# EAGLE board OBD-II-UART_Panel_v13 (EAGLE 7.4.0), part 1 of 5
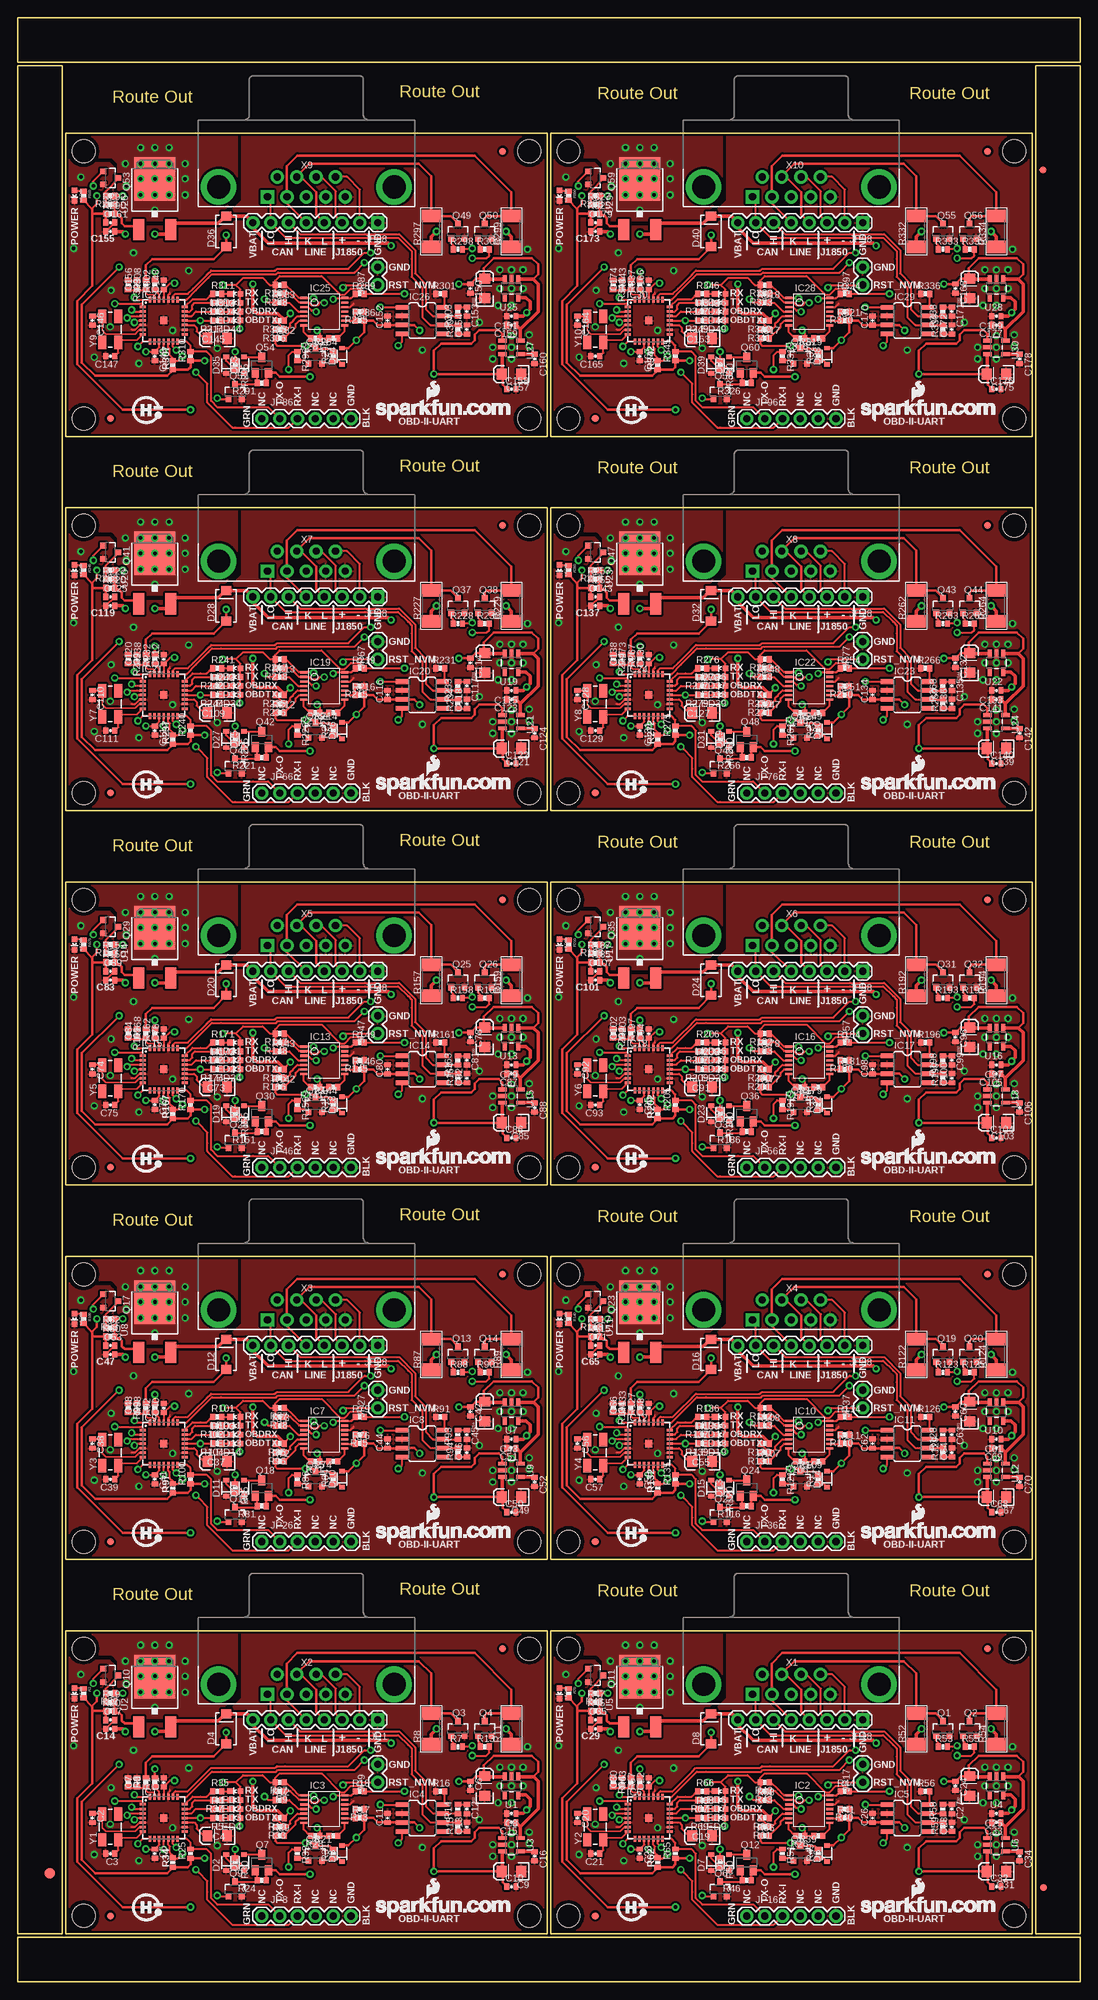
[diagram p0: board, top side]
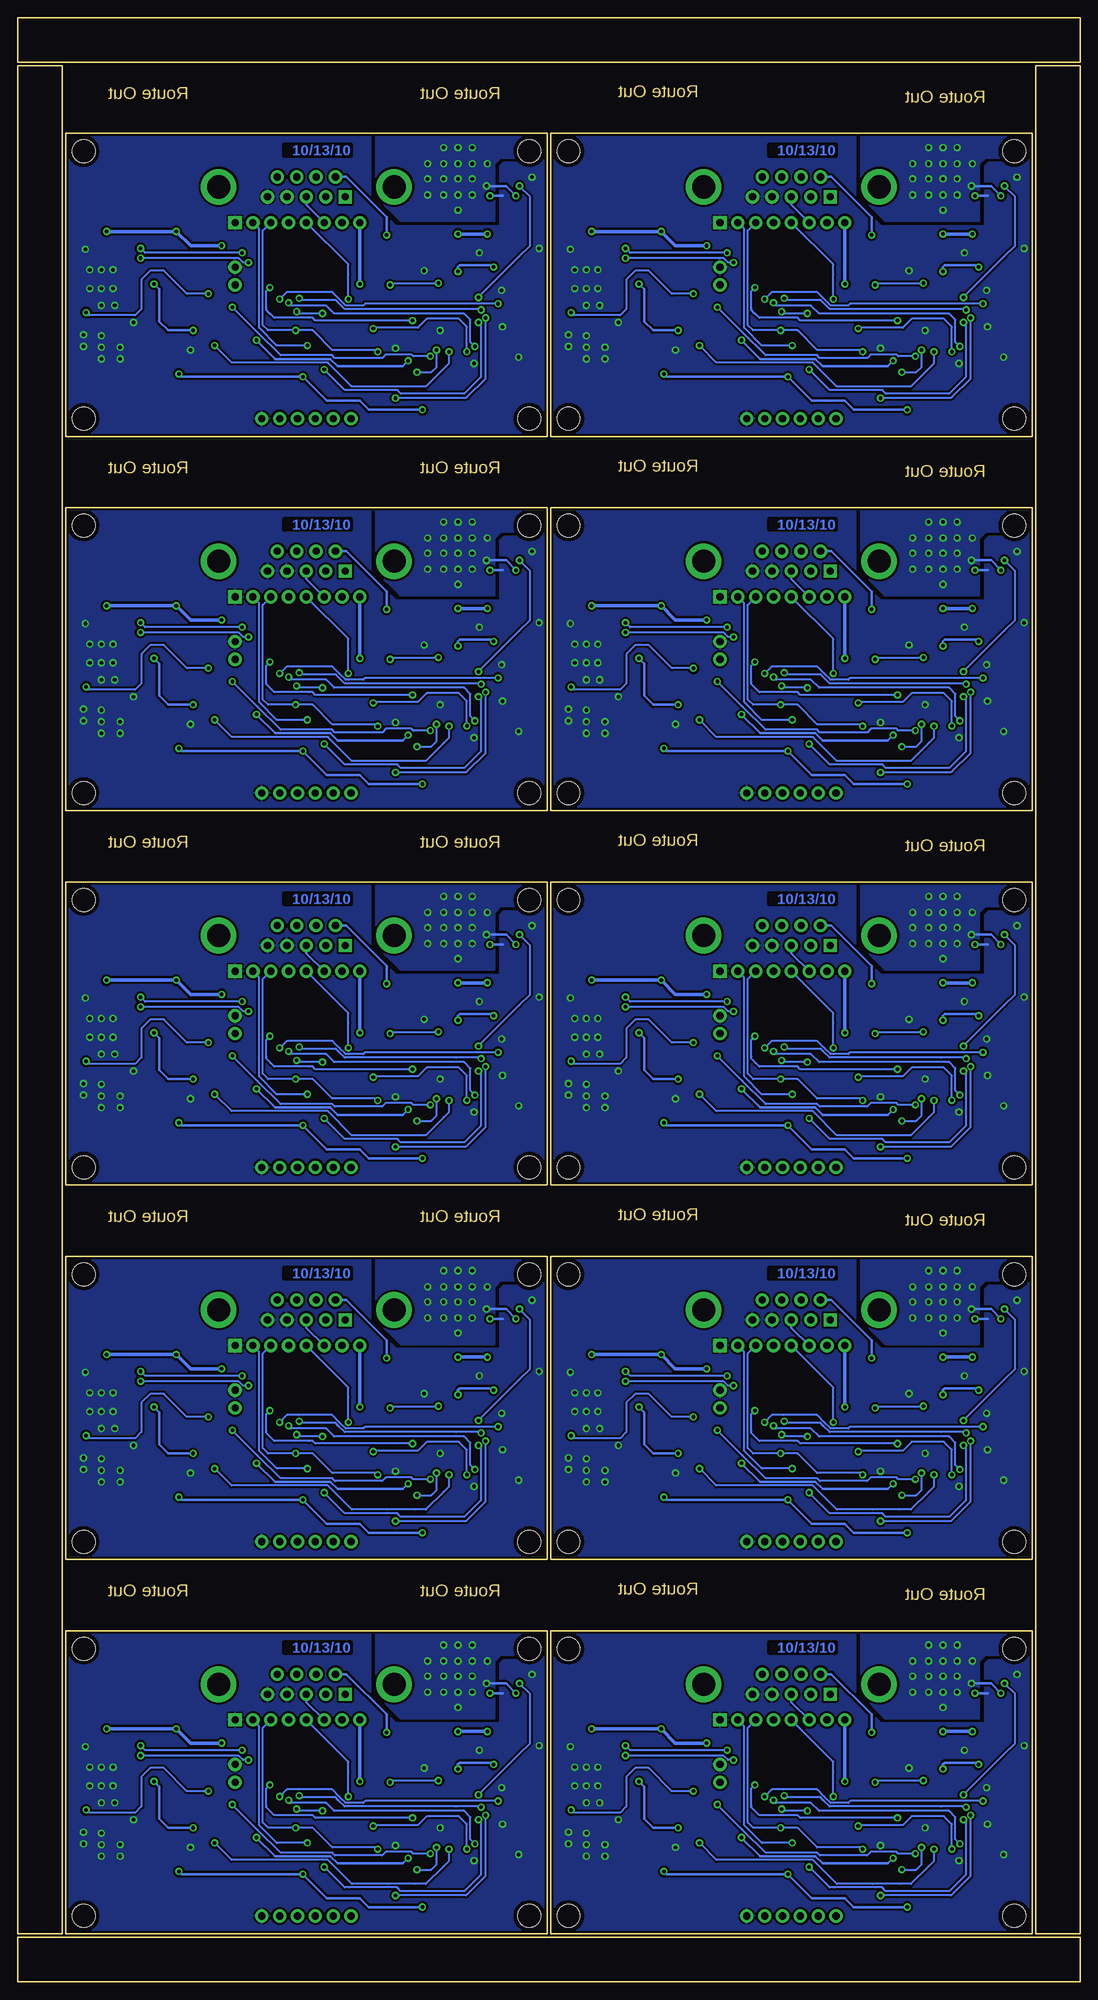
[diagram p1: board, bottom side, seen from below]

Size 151.38 x 279.91 mm. Coordinates in mm from the lower left corner, seen from the top.
Outline: 6.35,79.25 6.35,6.86 0,6.86 0,29.72
Outline: 0,27.18 0,273.05 6.35,273.05 6.35,76.71
Outline: 79.25,0 0,0 0,6.35 29.72,6.35
Outline: 27.18,6.35 151.38,6.35 151.38,0 76.71,0
Outline: 151.38,79.25 151.38,6.86 145.03,6.86 145.03,29.72
Outline: 145.03,27.18 145.03,273.05 151.38,273.05 151.38,76.71
Outline: 79.25,273.56 0,273.56 0,279.91 29.72,279.91
Outline: 27.18,279.91 151.38,279.91 151.38,273.56 76.71,273.56
Outline: 6.86,6.86 75.44,6.86 75.44,50.04 6.86,50.04 6.86,6.86
Outline: 75.95,6.86 144.53,6.86 144.53,50.04 75.95,50.04 75.95,6.86
Outline: 6.86,60.2 75.44,60.2 75.44,103.38 6.86,103.38 6.86,60.2
Outline: 75.95,60.2 144.53,60.2 144.53,103.38 75.95,103.38 75.95,60.2
Outline: 6.86,113.54 75.44,113.54 75.44,156.72 6.86,156.72 6.86,113.54
Outline: 75.95,113.54 144.53,113.54 144.53,156.72 75.95,156.72 75.95,113.54
Outline: 6.86,166.88 75.44,166.88 75.44,210.06 6.86,210.06 6.86,166.88
Outline: 75.95,166.88 144.53,166.88 144.53,210.06 75.95,210.06 75.95,166.88
Outline: 6.86,220.22 75.44,220.22 75.44,263.4 6.86,263.4 6.86,220.22
Outline: 75.95,220.22 144.53,220.22 144.53,263.4 75.95,263.4 75.95,220.22
Copper layers (1*16): Top 0.035mm / dielectric 1.5mm / Bottom 0.035mm
Design rules "SparkFun *": minimum track width 8mil, minimum drill 20mil, track to track 6mil, track to pad 6mil, pad to pad 6mil, via to via 6mil, smd to smd 6mil, copper to edge 8mil, drill to drill 8mil, minimum pad ring 12mil, minimum via ring 10mil, stop-mask expansion 4mil, vias tented up to drill 20mil, thermal gap 10mil

## Footprints (pad centres in the part's own frame; a part is rotated, then mirrored left to right if it is on the bottom)
0402-CAP = smd 0.7 x 0.9: 1 -0.65,0; 2 0.65,0
EIA3216 = smd 1.4 x 1.6: A 1.4,0; C -1.4,0
SOD-323 = smd 0.63 x 0.83: 1 -1.15,0; 2 1.15,0
SMA-DIODE = smd 1.27 x 1.47: A -2.15,0; C 2.15,0
FIDUCIAL-1.5X3 = smd 1.5 x 1.5: 1 0,0
FIDUCIAL-1X2 = smd 1 x 1: 1 0,0
_STN_SCANTOOL_QFN-28-S = smd 0.85 x 0.35: 1 -3,1.95; 2 -3,1.3; 3 -3,0.65; 4 -3,0; 5 -3,-0.65; 6 -3,-1.3; 7 -3,-1.95; 15 3,-1.95; 16 3,-1.3; 17 3,-0.65; 18 3,0; 19 3,0.65; 20 3,1.3; 21 3,1.95 | smd 0.35 x 0.85: 8 -1.95,-3; 9 -1.3,-3; 10 -0.65,-3; 11 0,-3; 12 0.65,-3; 13 1.3,-3; 14 1.95,-3; 22 1.95,3; 23 1.3,3; 24 0.65,3; 25 0,3; 26 -0.65,3; 27 -1.3,3; 28 -1.95,3 | smd 1 x 1: EXP 0,0
TSSOP-14 = smd 0.305 x 0.991: 1 -1.95,-2.925; 2 -1.3,-2.925; 3 -0.65,-2.925; 4 0,-2.925; 5 0.65,-2.925; 6 1.3,-2.925; 7 1.95,-2.925; 8 1.95,2.925; 9 1.3,2.925; 10 0.65,2.925; 11 0,2.925; 12 -0.65,2.925; 13 -1.3,2.925; 14 -1.95,2.925
SO-8 = smd 0.65 x 1.75: 1 -1.905,-2.873; 2 -0.635,-2.873; 3 0.635,-2.873; 4 1.905,-2.873; 5 1.905,2.873; 6 0.635,2.873; 7 -0.635,2.873; 8 -1.905,2.873
1X08 = drill 1.016 pad 1.88 square: 1 0,0 | drill 1.016 pad 1.88: 2 2.54,0; 3 5.08,0; 4 7.62,0; 5 10.16,0; 6 12.7,0; 7 15.24,0; 8 17.78,0
STAND-OFF = hole 3.302: 0,0
FTDI_BASIC = drill 1.016 pad 1.88: CTS 10.16,0; DTR 0,0; GND 12.7,0; RXI 2.54,0; TXO 5.08,0; VCC 7.62,0
1X02 = drill 1.016 pad 1.88: 1 0,0; 2 2.54,0
LED-0603 = smd 0.8 x 0.8: A 0,-0.75; C 0,0.75
SOT23-3 = smd 0.8 x 0.9: 1 -0.95,-1; 2 0.95,-1; 3 0,1.1
SOT23 = smd 1 x 1.4: 1 -0.95,-1.1; 2 0.95,-1.1; 3 0,1.1
0402-RES = smd 0.7 x 0.9: 1 -0.65,0; 2 0.65,0
2010 = smd 1.8 x 2.7: 1 -2.2,0; 2 2.2,0
SOT23-5 = smd 0.55 x 1.2: 1 -0.95,-1.3; 2 0,-1.3; 3 0.95,-1.3; 4 0.95,1.3; 5 -0.95,1.3
V-REG_DPACK = smd 1.6 x 3: 1 -2.28,-4.8; 3 2.28,-4.8 | smd 5.8 x 6.2: 4 0,2.38
DB9_MALE = drill 1.016 pad 1.88: 1 5.54,-1.42; 2 2.77,-1.42; 3 0,-1.42; 4 -2.77,-1.42; 6 4.15,1.42; 7 1.38,1.42; 8 -1.38,1.42; 9 -4.15,1.42 | drill 1.016 pad 1.88 square: 5 -5.54,-1.42 | drill 3.302 pad 5.08: G1 -12.5,0; G2 12.5,0
CRYSTAL-SMD-5X3 = smd 1.9 x 1.1: 1 -1.85,-1.15; 2 1.85,-1.15; 3 1.85,1.15; 4 -1.85,1.15

## Placement (x,y rotation side)
C1  1uF  [0402-CAP]  20.83,28.45 90 top
C2  27pF  [0402-CAP]  10.67,23.37 270 top
C3  27pF  [0402-CAP]  13.21,18.29 180 top
C4  10uF ESR<=5  [EIA3216]  28.45,20.83 180 top
C5  1uF  [0402-CAP]  19.56,18.29 270 top
C6  1uF  [0402-CAP]  64.52,27.94 270 top
C7  0.1uF  [0402-CAP]  17.02,28.45 90 top
C8  4.7uF  [0402-CAP]  70.36,24 180 top
C9  10uF  [EIA3216]  70.36,15.75 180 top
C10  0.1uF  [0402-CAP]  70.36,13.59 0 top
C11  1uF  [0402-CAP]  52.7,23.37 90 top
C12  560pF  [0402-CAP]  64.01,24.64 270 top
C13  560pF  [0402-CAP]  64.01,22.1 90 top
C14  0.1uF  [0402-CAP]  13.21,36.07 180 top
C15  2.2uF  [0402-CAP]  70.36,22.73 180 top
C16  470pF  [0402-CAP]  73.66,17.91 270 top
C17  1uF  [0402-CAP]  13.21,37.34 0 top
C18  10uF  [EIA3216]  66.55,27.94 90 top
C19  10uF ESR<=5  [EIA3216]  97.54,20.83 180 top
C20  27pF  [0402-CAP]  79.76,23.37 270 top
C21  27pF  [0402-CAP]  82.3,18.29 180 top
C22  1uF  [0402-CAP]  89.92,28.45 90 top
C23  1uF  [0402-CAP]  88.65,18.29 270 top
C24  1uF  [0402-CAP]  133.6,27.94 270 top
C25  4.7uF  [0402-CAP]  139.45,24 180 top
C26  1uF  [0402-CAP]  121.79,23.37 90 top
C27  560pF  [0402-CAP]  133.1,24.64 270 top
C28  560pF  [0402-CAP]  133.1,22.1 90 top
C29  0.1uF  [0402-CAP]  82.3,36.07 180 top
C30  0.1uF  [0402-CAP]  86.11,28.45 90 top
C31  10uF  [EIA3216]  139.45,15.75 180 top
C32  0.1uF  [0402-CAP]  139.45,13.59 0 top
C33  2.2uF  [0402-CAP]  139.45,22.73 180 top
C34  470pF  [0402-CAP]  142.75,17.91 270 top
C35  1uF  [0402-CAP]  82.3,37.34 0 top
C36  10uF  [EIA3216]  135.64,27.94 90 top
C37  10uF ESR<=5  [EIA3216]  28.45,74.17 180 top
C38  27pF  [0402-CAP]  10.67,76.71 270 top
C39  27pF  [0402-CAP]  13.21,71.63 180 top
C40  1uF  [0402-CAP]  20.83,81.79 90 top
C41  1uF  [0402-CAP]  19.56,71.63 270 top
C42  1uF  [0402-CAP]  64.52,81.28 270 top
C43  4.7uF  [0402-CAP]  70.36,77.34 180 top
C44  1uF  [0402-CAP]  52.7,76.71 90 top
C45  560pF  [0402-CAP]  64.01,77.98 270 top
C46  560pF  [0402-CAP]  64.01,75.44 90 top
C47  0.1uF  [0402-CAP]  13.21,89.41 180 top
C48  0.1uF  [0402-CAP]  17.02,81.79 90 top
C49  10uF  [EIA3216]  70.36,69.09 180 top
C50  0.1uF  [0402-CAP]  70.36,66.93 0 top
C51  2.2uF  [0402-CAP]  70.36,76.07 180 top
C52  470pF  [0402-CAP]  73.66,71.25 270 top
C53  1uF  [0402-CAP]  13.21,90.68 0 top
C54  10uF  [EIA3216]  66.55,81.28 90 top
C55  10uF ESR<=5  [EIA3216]  97.54,74.17 180 top
C56  27pF  [0402-CAP]  79.76,76.71 270 top
C57  27pF  [0402-CAP]  82.3,71.63 180 top
C58  1uF  [0402-CAP]  89.92,81.79 90 top
C59  1uF  [0402-CAP]  88.65,71.63 270 top
C60  1uF  [0402-CAP]  133.6,81.28 270 top
C61  4.7uF  [0402-CAP]  139.45,77.34 180 top
C62  1uF  [0402-CAP]  121.79,76.71 90 top
C63  560pF  [0402-CAP]  133.1,77.98 270 top
C64  560pF  [0402-CAP]  133.1,75.44 90 top
C65  0.1uF  [0402-CAP]  82.3,89.41 180 top
C66  0.1uF  [0402-CAP]  86.11,81.79 90 top
C67  10uF  [EIA3216]  139.45,69.09 180 top
C68  0.1uF  [0402-CAP]  139.45,66.93 0 top
C69  2.2uF  [0402-CAP]  139.45,76.07 180 top
C70  470pF  [0402-CAP]  142.75,71.25 270 top
C71  1uF  [0402-CAP]  82.3,90.68 0 top
C72  10uF  [EIA3216]  135.64,81.28 90 top
C73  10uF ESR<=5  [EIA3216]  28.45,127.51 180 top
C74  27pF  [0402-CAP]  10.67,130.05 270 top
C75  27pF  [0402-CAP]  13.21,124.97 180 top
C76  1uF  [0402-CAP]  20.83,135.13 90 top
C77  1uF  [0402-CAP]  19.56,124.97 270 top
C78  1uF  [0402-CAP]  64.52,134.62 270 top
C79  4.7uF  [0402-CAP]  70.36,130.68 180 top
C80  1uF  [0402-CAP]  52.7,130.05 90 top
C81  560pF  [0402-CAP]  64.01,131.32 270 top
C82  560pF  [0402-CAP]  64.01,128.78 90 top
C83  0.1uF  [0402-CAP]  13.21,142.75 180 top
C84  0.1uF  [0402-CAP]  17.02,135.13 90 top
C85  10uF  [EIA3216]  70.36,122.43 180 top
C86  0.1uF  [0402-CAP]  70.36,120.27 0 top
C87  2.2uF  [0402-CAP]  70.36,129.41 180 top
C88  470pF  [0402-CAP]  73.66,124.59 270 top
C89  1uF  [0402-CAP]  13.21,144.02 0 top
C90  10uF  [EIA3216]  66.55,134.62 90 top
C91  10uF ESR<=5  [EIA3216]  97.54,127.51 180 top
C92  27pF  [0402-CAP]  79.76,130.05 270 top
C93  27pF  [0402-CAP]  82.3,124.97 180 top
C94  1uF  [0402-CAP]  89.92,135.13 90 top
C95  1uF  [0402-CAP]  88.65,124.97 270 top
C96  1uF  [0402-CAP]  133.6,134.62 270 top
C97  4.7uF  [0402-CAP]  139.45,130.68 180 top
C98  1uF  [0402-CAP]  121.79,130.05 90 top
C99  560pF  [0402-CAP]  133.1,131.32 270 top
C100  560pF  [0402-CAP]  133.1,128.78 90 top
C101  0.1uF  [0402-CAP]  82.3,142.75 180 top
C102  0.1uF  [0402-CAP]  86.11,135.13 90 top
C103  10uF  [EIA3216]  139.45,122.43 180 top
C104  0.1uF  [0402-CAP]  139.45,120.27 0 top
C105  2.2uF  [0402-CAP]  139.45,129.41 180 top
C106  470pF  [0402-CAP]  142.75,124.59 270 top
C107  1uF  [0402-CAP]  82.3,144.02 0 top
C108  10uF  [EIA3216]  135.64,134.62 90 top
C109  10uF ESR<=5  [EIA3216]  28.45,180.85 180 top
C110  27pF  [0402-CAP]  10.67,183.39 270 top
C111  27pF  [0402-CAP]  13.21,178.31 180 top
C112  1uF  [0402-CAP]  20.83,188.47 90 top
C113  1uF  [0402-CAP]  19.56,178.31 270 top
C114  1uF  [0402-CAP]  64.52,187.96 270 top
C115  4.7uF  [0402-CAP]  70.36,184.02 180 top
C116  1uF  [0402-CAP]  52.7,183.39 90 top
C117  560pF  [0402-CAP]  64.01,184.66 270 top
C118  560pF  [0402-CAP]  64.01,182.12 90 top
C119  0.1uF  [0402-CAP]  13.21,196.09 180 top
C120  0.1uF  [0402-CAP]  17.02,188.47 90 top
C121  10uF  [EIA3216]  70.36,175.77 180 top
C122  0.1uF  [0402-CAP]  70.36,173.61 0 top
C123  2.2uF  [0402-CAP]  70.36,182.75 180 top
C124  470pF  [0402-CAP]  73.66,177.93 270 top
C125  1uF  [0402-CAP]  13.21,197.36 0 top
C126  10uF  [EIA3216]  66.55,187.96 90 top
C127  10uF ESR<=5  [EIA3216]  97.54,180.85 180 top
C128  27pF  [0402-CAP]  79.76,183.39 270 top
C129  27pF  [0402-CAP]  82.3,178.31 180 top
C130  1uF  [0402-CAP]  89.92,188.47 90 top
C131  1uF  [0402-CAP]  88.65,178.31 270 top
C132  1uF  [0402-CAP]  133.6,187.96 270 top
C133  4.7uF  [0402-CAP]  139.45,184.02 180 top
C134  1uF  [0402-CAP]  121.79,183.39 90 top
C135  560pF  [0402-CAP]  133.1,184.66 270 top
C136  560pF  [0402-CAP]  133.1,182.12 90 top
C137  0.1uF  [0402-CAP]  82.3,196.09 180 top
C138  0.1uF  [0402-CAP]  86.11,188.47 90 top
C139  10uF  [EIA3216]  139.45,175.77 180 top
C140  0.1uF  [0402-CAP]  139.45,173.61 0 top
C141  2.2uF  [0402-CAP]  139.45,182.75 180 top
C142  470pF  [0402-CAP]  142.75,177.93 270 top
C143  1uF  [0402-CAP]  82.3,197.36 0 top
C144  10uF  [EIA3216]  135.64,187.96 90 top
C145  10uF ESR<=5  [EIA3216]  28.45,234.19 180 top
C146  27pF  [0402-CAP]  10.67,236.73 270 top
C147  27pF  [0402-CAP]  13.21,231.65 180 top
C148  1uF  [0402-CAP]  20.83,241.81 90 top
C149  1uF  [0402-CAP]  19.56,231.65 270 top
C150  1uF  [0402-CAP]  64.52,241.3 270 top
C151  4.7uF  [0402-CAP]  70.36,237.36 180 top
C152  1uF  [0402-CAP]  52.7,236.73 90 top
C153  560pF  [0402-CAP]  64.01,238 270 top
C154  560pF  [0402-CAP]  64.01,235.46 90 top
C155  0.1uF  [0402-CAP]  13.21,249.43 180 top
C156  0.1uF  [0402-CAP]  17.02,241.81 90 top
C157  10uF  [EIA3216]  70.36,229.11 180 top
C158  0.1uF  [0402-CAP]  70.36,226.95 0 top
C159  2.2uF  [0402-CAP]  70.36,236.09 180 top
C160  470pF  [0402-CAP]  73.66,231.27 270 top
C161  1uF  [0402-CAP]  13.21,250.7 0 top
C162  10uF  [EIA3216]  66.55,241.3 90 top
C163  10uF ESR<=5  [EIA3216]  97.54,234.19 180 top
C164  27pF  [0402-CAP]  79.76,236.73 270 top
C165  27pF  [0402-CAP]  82.3,231.65 180 top
C166  1uF  [0402-CAP]  89.92,241.81 90 top
C167  1uF  [0402-CAP]  88.65,231.65 270 top
C168  1uF  [0402-CAP]  133.6,241.3 270 top
C169  4.7uF  [0402-CAP]  139.45,237.36 180 top
C170  1uF  [0402-CAP]  121.79,236.73 90 top
C171  560pF  [0402-CAP]  133.1,238 270 top
C172  560pF  [0402-CAP]  133.1,235.46 90 top
C173  0.1uF  [0402-CAP]  82.3,249.43 180 top
C174  0.1uF  [0402-CAP]  86.11,241.81 90 top
C175  10uF  [EIA3216]  139.45,229.11 180 top
C176  0.1uF  [0402-CAP]  139.45,226.95 0 top
C177  2.2uF  [0402-CAP]  139.45,236.09 180 top
C178  470pF  [0402-CAP]  142.75,231.27 270 top
C179  1uF  [0402-CAP]  82.3,250.7 0 top
C180  10uF  [EIA3216]  135.64,241.3 90 top
D1  BAS16  [SOD-323]  32.26,17.02 90 top
D2  BAS16  [SOD-323]  29.72,17.02 90 top
D3  BAS16  [SOD-323]  46.23,18.29 90 top
D4  MBRA140  [SMA-DIODE]  29.72,36.07 90 top
D5  BAS16  [SOD-323]  101.35,17.02 90 top
D6  BAS16  [SOD-323]  115.32,18.29 90 top
D7  BAS16  [SOD-323]  98.81,17.02 90 top
D8  MBRA140  [SMA-DIODE]  98.81,36.07 90 top
D9  BAS16  [SOD-323]  32.26,70.36 90 top
D10  BAS16  [SOD-323]  46.23,71.63 90 top
D11  BAS16  [SOD-323]  29.72,70.36 90 top
D12  MBRA140  [SMA-DIODE]  29.72,89.41 90 top
D13  BAS16  [SOD-323]  101.35,70.36 90 top
D14  BAS16  [SOD-323]  115.32,71.63 90 top
D15  BAS16  [SOD-323]  98.81,70.36 90 top
D16  MBRA140  [SMA-DIODE]  98.81,89.41 90 top
D17  BAS16  [SOD-323]  32.26,123.7 90 top
D18  BAS16  [SOD-323]  46.23,124.97 90 top
D19  BAS16  [SOD-323]  29.72,123.7 90 top
D20  MBRA140  [SMA-DIODE]  29.72,142.75 90 top
D21  BAS16  [SOD-323]  101.35,123.7 90 top
D22  BAS16  [SOD-323]  115.32,124.97 90 top
D23  BAS16  [SOD-323]  98.81,123.7 90 top
D24  MBRA140  [SMA-DIODE]  98.81,142.75 90 top
D25  BAS16  [SOD-323]  32.26,177.04 90 top
D26  BAS16  [SOD-323]  46.23,178.31 90 top
D27  BAS16  [SOD-323]  29.72,177.04 90 top
D28  MBRA140  [SMA-DIODE]  29.72,196.09 90 top
D29  BAS16  [SOD-323]  101.35,177.04 90 top
D30  BAS16  [SOD-323]  115.32,178.31 90 top
D31  BAS16  [SOD-323]  98.81,177.04 90 top
D32  MBRA140  [SMA-DIODE]  98.81,196.09 90 top
D33  BAS16  [SOD-323]  32.26,230.38 90 top
D34  BAS16  [SOD-323]  46.23,231.65 90 top
D35  BAS16  [SOD-323]  29.72,230.38 90 top
D36  MBRA140  [SMA-DIODE]  29.72,249.43 90 top
D37  BAS16  [SOD-323]  101.35,230.38 90 top
D38  BAS16  [SOD-323]  115.32,231.65 90 top
D39  BAS16  [SOD-323]  98.81,230.38 90 top
D40  MBRA140  [SMA-DIODE]  98.81,249.43 90 top
E$1  [FIDUCIAL-1.5X3]  4.57,15.49 0 top
E$5  [FIDUCIAL-1X2]  146.18,13.46 0 top
E$8  [FIDUCIAL-1X2]  146.05,258.19 90 top
IC1  SCANTOOL  [_STN_SCANTOOL_QFN-28-S]  20.83,23.37 0 top
IC2  LM339PWR  [TSSOP-14]  112.78,24.64 270 top
IC3  LM339PWR  [TSSOP-14]  43.69,24.64 270 top
IC4  MCP2551  [SO-8]  57.66,23.37 270 top
IC5  MCP2551  [SO-8]  126.75,23.37 270 top
IC6  SCANTOOL  [_STN_SCANTOOL_QFN-28-S]  89.92,23.37 0 top
IC7  LM339PWR  [TSSOP-14]  43.69,77.98 270 top
IC8  MCP2551  [SO-8]  57.66,76.71 270 top
IC9  SCANTOOL  [_STN_SCANTOOL_QFN-28-S]  20.83,76.71 0 top
IC10  LM339PWR  [TSSOP-14]  112.78,77.98 270 top
IC11  MCP2551  [SO-8]  126.75,76.71 270 top
IC12  SCANTOOL  [_STN_SCANTOOL_QFN-28-S]  89.92,76.71 0 top
IC13  LM339PWR  [TSSOP-14]  43.69,131.32 270 top
IC14  MCP2551  [SO-8]  57.66,130.05 270 top
IC15  SCANTOOL  [_STN_SCANTOOL_QFN-28-S]  20.83,130.05 0 top
IC16  LM339PWR  [TSSOP-14]  112.78,131.32 270 top
IC17  MCP2551  [SO-8]  126.75,130.05 270 top
IC18  SCANTOOL  [_STN_SCANTOOL_QFN-28-S]  89.92,130.05 0 top
IC19  LM339PWR  [TSSOP-14]  43.69,184.66 270 top
IC20  MCP2551  [SO-8]  57.66,183.39 270 top
IC21  SCANTOOL  [_STN_SCANTOOL_QFN-28-S]  20.83,183.39 0 top
IC22  LM339PWR  [TSSOP-14]  112.78,184.66 270 top
IC23  MCP2551  [SO-8]  126.75,183.39 270 top
IC24  SCANTOOL  [_STN_SCANTOOL_QFN-28-S]  89.92,183.39 0 top
IC25  LM339PWR  [TSSOP-14]  43.69,238 270 top
IC26  MCP2551  [SO-8]  57.66,236.73 270 top
IC27  SCANTOOL  [_STN_SCANTOOL_QFN-28-S]  20.83,236.73 0 top
IC28  LM339PWR  [TSSOP-14]  112.78,238 270 top
IC29  MCP2551  [SO-8]  126.75,236.73 270 top
IC30  SCANTOOL  [_STN_SCANTOOL_QFN-28-S]  89.92,236.73 0 top
JP1  [1X08]  51.31,37.34 180 top
JP2  FIDUCIAL1X2  [FIDUCIAL-1X2]  13.21,9.4 0 top
JP3  LOGO-SFENEW  [SFE-NEW-WEBLOGO]  51.05,9.02 0 top
JP4  STAND-OFF  [STAND-OFF]  9.4,9.4 0 top
JP5  STAND-OFF  [STAND-OFF]  72.9,47.5 0 top
JP6  STAND-OFF  [STAND-OFF]  72.9,9.4 0 top
JP7  STAND-OFF  [STAND-OFF]  9.4,47.5 0 top
JP8  DNP  [FTDI_BASIC]  34.8,9.4 0 top
JP9  DNP  [1X02]  51.31,28.45 90 top
JP10  FIDUCIAL1X2  [FIDUCIAL-1X2]  69.09,47.5 0 top
JP11  LOGO-SFENEW  [SFE-NEW-WEBLOGO]  120.14,9.02 0 top
JP12  STAND-OFF  [STAND-OFF]  78.49,9.4 0 top
JP13  STAND-OFF  [STAND-OFF]  141.99,47.5 0 top
JP14  STAND-OFF  [STAND-OFF]  141.99,9.4 0 top
JP15  STAND-OFF  [STAND-OFF]  78.49,47.5 0 top
JP16  DNP  [FTDI_BASIC]  103.89,9.4 0 top
JP17  DNP  [1X02]  120.4,28.45 90 top
JP18  [1X08]  120.4,37.34 180 top
JP19  FIDUCIAL1X2  [FIDUCIAL-1X2]  82.3,9.4 0 top
JP20  FIDUCIAL1X2  [FIDUCIAL-1X2]  138.18,47.5 0 top
JP21  LOGO-SFENEW  [SFE-NEW-WEBLOGO]  51.05,62.36 0 top
JP22  STAND-OFF  [STAND-OFF]  9.4,62.74 0 top
JP23  STAND-OFF  [STAND-OFF]  72.9,100.84 0 top
JP24  STAND-OFF  [STAND-OFF]  72.9,62.74 0 top
JP25  STAND-OFF  [STAND-OFF]  9.4,100.84 0 top
JP26  DNP  [FTDI_BASIC]  34.8,62.74 0 top
JP27  DNP  [1X02]  51.31,81.79 90 top
JP28  [1X08]  51.31,90.68 180 top
JP29  FIDUCIAL1X2  [FIDUCIAL-1X2]  13.21,62.74 0 top
JP30  FIDUCIAL1X2  [FIDUCIAL-1X2]  69.09,100.84 0 top
JP31  LOGO-SFENEW  [SFE-NEW-WEBLOGO]  120.14,62.36 0 top
JP32  STAND-OFF  [STAND-OFF]  78.49,62.74 0 top
JP33  STAND-OFF  [STAND-OFF]  141.99,100.84 0 top
JP34  STAND-OFF  [STAND-OFF]  141.99,62.74 0 top
JP35  STAND-OFF  [STAND-OFF]  78.49,100.84 0 top
JP36  DNP  [FTDI_BASIC]  103.89,62.74 0 top
JP37  DNP  [1X02]  120.4,81.79 90 top
JP38  [1X08]  120.4,90.68 180 top
JP39  FIDUCIAL1X2  [FIDUCIAL-1X2]  82.3,62.74 0 top
JP40  FIDUCIAL1X2  [FIDUCIAL-1X2]  138.18,100.84 0 top
JP41  LOGO-SFENEW  [SFE-NEW-WEBLOGO]  51.05,115.7 0 top
JP42  STAND-OFF  [STAND-OFF]  9.4,116.08 0 top
JP43  STAND-OFF  [STAND-OFF]  72.9,154.18 0 top
JP44  STAND-OFF  [STAND-OFF]  72.9,116.08 0 top
JP45  STAND-OFF  [STAND-OFF]  9.4,154.18 0 top
JP46  DNP  [FTDI_BASIC]  34.8,116.08 0 top
JP47  DNP  [1X02]  51.31,135.13 90 top
JP48  [1X08]  51.31,144.02 180 top
JP49  FIDUCIAL1X2  [FIDUCIAL-1X2]  13.21,116.08 0 top
JP50  FIDUCIAL1X2  [FIDUCIAL-1X2]  69.09,154.18 0 top
JP51  LOGO-SFENEW  [SFE-NEW-WEBLOGO]  120.14,115.7 0 top
JP52  STAND-OFF  [STAND-OFF]  78.49,116.08 0 top
JP53  STAND-OFF  [STAND-OFF]  141.99,154.18 0 top
JP54  STAND-OFF  [STAND-OFF]  141.99,116.08 0 top
JP55  STAND-OFF  [STAND-OFF]  78.49,154.18 0 top
JP56  DNP  [FTDI_BASIC]  103.89,116.08 0 top
JP57  DNP  [1X02]  120.4,135.13 90 top
JP58  [1X08]  120.4,144.02 180 top
JP59  FIDUCIAL1X2  [FIDUCIAL-1X2]  82.3,116.08 0 top
JP60  FIDUCIAL1X2  [FIDUCIAL-1X2]  138.18,154.18 0 top
JP61  LOGO-SFENEW  [SFE-NEW-WEBLOGO]  51.05,169.04 0 top
JP62  STAND-OFF  [STAND-OFF]  9.4,169.42 0 top
JP63  STAND-OFF  [STAND-OFF]  72.9,207.52 0 top
JP64  STAND-OFF  [STAND-OFF]  72.9,169.42 0 top
JP65  STAND-OFF  [STAND-OFF]  9.4,207.52 0 top
JP66  DNP  [FTDI_BASIC]  34.8,169.42 0 top
JP67  DNP  [1X02]  51.31,188.47 90 top
JP68  [1X08]  51.31,197.36 180 top
JP69  FIDUCIAL1X2  [FIDUCIAL-1X2]  13.21,169.42 0 top
JP70  FIDUCIAL1X2  [FIDUCIAL-1X2]  69.09,207.52 0 top
JP71  LOGO-SFENEW  [SFE-NEW-WEBLOGO]  120.14,169.04 0 top
JP72  STAND-OFF  [STAND-OFF]  78.49,169.42 0 top
JP73  STAND-OFF  [STAND-OFF]  141.99,207.52 0 top
JP74  STAND-OFF  [STAND-OFF]  141.99,169.42 0 top
JP75  STAND-OFF  [STAND-OFF]  78.49,207.52 0 top
JP76  DNP  [FTDI_BASIC]  103.89,169.42 0 top
JP77  DNP  [1X02]  120.4,188.47 90 top
JP78  [1X08]  120.4,197.36 180 top
JP79  FIDUCIAL1X2  [FIDUCIAL-1X2]  82.3,169.42 0 top
JP80  FIDUCIAL1X2  [FIDUCIAL-1X2]  138.18,207.52 0 top
JP81  LOGO-SFENEW  [SFE-NEW-WEBLOGO]  51.05,222.38 0 top
JP82  STAND-OFF  [STAND-OFF]  9.4,222.76 0 top
JP83  STAND-OFF  [STAND-OFF]  72.9,260.86 0 top
JP84  STAND-OFF  [STAND-OFF]  72.9,222.76 0 top
JP85  STAND-OFF  [STAND-OFF]  9.4,260.86 0 top
JP86  DNP  [FTDI_BASIC]  34.8,222.76 0 top
JP87  DNP  [1X02]  51.31,241.81 90 top
JP88  [1X08]  51.31,250.7 180 top
JP89  FIDUCIAL1X2  [FIDUCIAL-1X2]  13.21,222.76 0 top
JP90  FIDUCIAL1X2  [FIDUCIAL-1X2]  69.09,260.86 0 top
JP91  LOGO-SFENEW  [SFE-NEW-WEBLOGO]  120.14,222.38 0 top
JP92  STAND-OFF  [STAND-OFF]  78.49,222.76 0 top
JP93  STAND-OFF  [STAND-OFF]  141.99,260.86 0 top
JP94  STAND-OFF  [STAND-OFF]  141.99,222.76 0 top
JP95  STAND-OFF  [STAND-OFF]  78.49,260.86 0 top
JP96  DNP  [FTDI_BASIC]  103.89,222.76 0 top
JP97  DNP  [1X02]  120.4,241.81 90 top
JP98  [1X08]  120.4,250.7 180 top
JP99  FIDUCIAL1X2  [FIDUCIAL-1X2]  82.3,222.76 0 top
JP100  FIDUCIAL1X2  [FIDUCIAL-1X2]  138.18,260.86 0 top
LED1  YELLOW  [LED-0603]  30.99,27.18 90 top
LED2  RED  [LED-0603]  30.99,25.91 90 top
LED3  YELLOW  [LED-0603]  30.99,24.64 90 top
LED4  RED  [LED-0603]  30.99,23.37 90 top
LED5  RED  [LED-0603]  8.13,41.15 180 top
LED6  YELLOW  [LED-0603]  100.08,27.18 90 top
LED7  RED  [LED-0603]  100.08,25.91 90 top
LED8  YELLOW  [LED-0603]  100.08,24.64 90 top
LED9  RED  [LED-0603]  100.08,23.37 90 top
LED10  RED  [LED-0603]  77.22,41.15 180 top
LED11  YELLOW  [LED-0603]  30.99,80.52 90 top
LED12  RED  [LED-0603]  30.99,79.25 90 top
LED13  YELLOW  [LED-0603]  30.99,77.98 90 top
LED14  RED  [LED-0603]  30.99,76.71 90 top
LED15  RED  [LED-0603]  8.13,94.49 180 top
LED16  YELLOW  [LED-0603]  100.08,80.52 90 top
LED17  RED  [LED-0603]  100.08,79.25 90 top
LED18  YELLOW  [LED-0603]  100.08,77.98 90 top
LED19  RED  [LED-0603]  100.08,76.71 90 top
LED20  RED  [LED-0603]  77.22,94.49 180 top
LED21  YELLOW  [LED-0603]  30.99,133.86 90 top
LED22  RED  [LED-0603]  30.99,132.59 90 top
LED23  YELLOW  [LED-0603]  30.99,131.32 90 top
LED24  RED  [LED-0603]  30.99,130.05 90 top
LED25  RED  [LED-0603]  8.13,147.83 180 top
LED26  YELLOW  [LED-0603]  100.08,133.86 90 top
LED27  RED  [LED-0603]  100.08,132.59 90 top
LED28  YELLOW  [LED-0603]  100.08,131.32 90 top
LED29  RED  [LED-0603]  100.08,130.05 90 top
LED30  RED  [LED-0603]  77.22,147.83 180 top
LED31  YELLOW  [LED-0603]  30.99,187.2 90 top
LED32  RED  [LED-0603]  30.99,185.93 90 top
LED33  YELLOW  [LED-0603]  30.99,184.66 90 top
LED34  RED  [LED-0603]  30.99,183.39 90 top
LED35  RED  [LED-0603]  8.13,201.17 180 top
LED36  YELLOW  [LED-0603]  100.08,187.2 90 top
LED37  RED  [LED-0603]  100.08,185.93 90 top
LED38  YELLOW  [LED-0603]  100.08,184.66 90 top
LED39  RED  [LED-0603]  100.08,183.39 90 top
LED40  RED  [LED-0603]  77.22,201.17 180 top
LED41  YELLOW  [LED-0603]  30.99,240.54 90 top
LED42  RED  [LED-0603]  30.99,239.27 90 top
LED43  YELLOW  [LED-0603]  30.99,238 90 top
LED44  RED  [LED-0603]  30.99,236.73 90 top
LED45  RED  [LED-0603]  8.13,254.51 180 top
LED46  YELLOW  [LED-0603]  100.08,240.54 90 top
LED47  RED  [LED-0603]  100.08,239.27 90 top
LED48  YELLOW  [LED-0603]  100.08,238 90 top
LED49  RED  [LED-0603]  100.08,236.73 90 top
LED50  RED  [LED-0603]  77.22,254.51 180 top
Q1  MMBT2222  [SOT23-3]  131.83,36.07 0 top
Q2  MMBT2222  [SOT23-3]  135.64,36.07 0 top
Q3  MMBT2222  [SOT23-3]  62.74,36.07 0 top
Q4  MMBT2222  [SOT23-3]  66.55,36.07 0 top
Q5  MMBT2222  [SOT23-3]  111.51,18.29 0 top
Q6  BSS138  [SOT23-3]  100.08,13.21 0 top
Q7  ZXMP6A13FTA  [SOT23]  34.8,17.02 0 top
Q8  MMBT2222  [SOT23-3]  42.42,18.29 0 top
Q9  BSS138  [SOT23-3]  30.99,13.21 0 top
Q10  BSS138  [SOT23-3]  13.21,43.69 270 top
Q11  BSS138  [SOT23-3]  82.3,43.69 270 top
Q12  ZXMP6A13FTA  [SOT23]  103.89,17.02 0 top
Q13  MMBT2222  [SOT23-3]  62.74,89.41 0 top
Q14  MMBT2222  [SOT23-3]  66.55,89.41 0 top
Q15  MMBT2222  [SOT23-3]  42.42,71.63 0 top
Q16  BSS138  [SOT23-3]  30.99,66.55 0 top
Q17  BSS138  [SOT23-3]  13.21,97.03 270 top
Q18  ZXMP6A13FTA  [SOT23]  34.8,70.36 0 top
Q19  MMBT2222  [SOT23-3]  131.83,89.41 0 top
Q20  MMBT2222  [SOT23-3]  135.64,89.41 0 top
Q21  MMBT2222  [SOT23-3]  111.51,71.63 0 top
Q22  BSS138  [SOT23-3]  100.08,66.55 0 top
Q23  BSS138  [SOT23-3]  82.3,97.03 270 top
Q24  ZXMP6A13FTA  [SOT23]  103.89,70.36 0 top
Q25  MMBT2222  [SOT23-3]  62.74,142.75 0 top
Q26  MMBT2222  [SOT23-3]  66.55,142.75 0 top
Q27  MMBT2222  [SOT23-3]  42.42,124.97 0 top
Q28  BSS138  [SOT23-3]  30.99,119.89 0 top
Q29  BSS138  [SOT23-3]  13.21,150.37 270 top
Q30  ZXMP6A13FTA  [SOT23]  34.8,123.7 0 top
Q31  MMBT2222  [SOT23-3]  131.83,142.75 0 top
Q32  MMBT2222  [SOT23-3]  135.64,142.75 0 top
Q33  MMBT2222  [SOT23-3]  111.51,124.97 0 top
Q34  BSS138  [SOT23-3]  100.08,119.89 0 top
Q35  BSS138  [SOT23-3]  82.3,150.37 270 top
Q36  ZXMP6A13FTA  [SOT23]  103.89,123.7 0 top
Q37  MMBT2222  [SOT23-3]  62.74,196.09 0 top
Q38  MMBT2222  [SOT23-3]  66.55,196.09 0 top
Q39  MMBT2222  [SOT23-3]  42.42,178.31 0 top
Q40  BSS138  [SOT23-3]  30.99,173.23 0 top
Q41  BSS138  [SOT23-3]  13.21,203.71 270 top
Q42  ZXMP6A13FTA  [SOT23]  34.8,177.04 0 top
Q43  MMBT2222  [SOT23-3]  131.83,196.09 0 top
Q44  MMBT2222  [SOT23-3]  135.64,196.09 0 top
Q45  MMBT2222  [SOT23-3]  111.51,178.31 0 top
Q46  BSS138  [SOT23-3]  100.08,173.23 0 top
Q47  BSS138  [SOT23-3]  82.3,203.71 270 top
Q48  ZXMP6A13FTA  [SOT23]  103.89,177.04 0 top
Q49  MMBT2222  [SOT23-3]  62.74,249.43 0 top
Q50  MMBT2222  [SOT23-3]  66.55,249.43 0 top
Q51  MMBT2222  [SOT23-3]  42.42,231.65 0 top
Q52  BSS138  [SOT23-3]  30.99,226.57 0 top
Q53  BSS138  [SOT23-3]  13.21,257.05 270 top
Q54  ZXMP6A13FTA  [SOT23]  34.8,230.38 0 top
Q55  MMBT2222  [SOT23-3]  131.83,249.43 0 top
Q56  MMBT2222  [SOT23-3]  135.64,249.43 0 top
Q57  MMBT2222  [SOT23-3]  111.51,231.65 0 top
Q58  BSS138  [SOT23-3]  100.08,226.57 0 top
Q59  BSS138  [SOT23-3]  82.3,257.05 270 top
Q60  ZXMP6A13FTA  [SOT23]  103.89,230.38 0 top
R1  10k  [0402-RES]  19.56,28.45 90 top
R2  1k  [0402-RES]  9.4,41.15 270 top
R3  62K  [0402-RES]  18.29,28.45 90 top
R4  330  [0402-RES]  28.45,24.64 0 top
R5  330  [0402-RES]  28.45,23.37 180 top
R6  10K  [0402-RES]  15.75,28.45 270 top
R7  1k  [0402-RES]  62.74,33.53 0 top
R8  510 0.5W  [2010]  58.93,36.07 90 top
R9  10k  [0402-RES]  37.34,27.18 180 top
R10  10k  [0402-RES]  37.34,23.37 180 top
R11  510 0.5W  [2010]  70.36,36.07 90 top
R12  10k  [0402-RES]  37.34,25.91 0 top
R13  1k  [0402-RES]  66.55,33.53 0 top
R14  100  [0402-RES]  62.74,24.64 270 top
R15  100  [0402-RES]  62.74,22.1 90 top
R16  4.7k  [0402-RES]  60.2,27.18 0 top
R17  1.2k  [0402-RES]  48.77,23.37 0 top
R18  10k  [0402-RES]  48.77,27.18 0 top
R19  866  [0402-RES]  13.21,39.88 0 top
R20  240  [0402-RES]  13.21,38.61 0 top
R21  10k  [0402-RES]  44.96,20.83 0 top
R22  374  [0402-RES]  13.21,41.15 180 top
R23  4.7k  [0402-RES]  48.77,24.64 180 top
R24  1.5k  [0402-RES]  34.8,14.48 180 top
R25  4.7k  [0402-RES]  24.64,18.29 90 top
R26  10k  [0402-RES]  111.51,20.83 180 top
R27  10k  [0402-RES]  37.34,28.45 180 top
R28  10k  [0402-RES]  42.42,20.83 180 top
R29  10k  [0402-RES]  37.34,20.83 0 top
R30  10k  [0402-RES]  30.99,17.02 270 top
R31  10k  [0402-RES]  44.96,18.29 90 top
R32  1k  [0402-RES]  39.88,18.29 270 top
R33  10k  [0402-RES]  37.34,22.1 180 top
R34  1.5k  [0402-RES]  22.1,17.02 90 top
R35  330  [0402-RES]  28.45,27.18 0 top
R36  10k  [0402-RES]  106.43,20.83 0 top
R37  330  [0402-RES]  28.45,25.91 180 top
R38  10k  [0402-RES]  106.43,25.91 0 top
R39  10k  [0402-RES]  114.05,20.83 0 top
R40  4.7k  [0402-RES]  117.86,24.64 180 top
R41  1.2k  [0402-RES]  117.86,23.37 0 top
R42  10k  [0402-RES]  106.43,28.45 180 top
R43  10k  [0402-RES]  106.43,27.18 180 top
R44  10k  [0402-RES]  117.86,27.18 0 top
R45  240  [0402-RES]  82.3,38.61 0 top
R46  1.5k  [0402-RES]  103.89,14.48 180 top
R47  866  [0402-RES]  82.3,39.88 0 top
R48  374  [0402-RES]  82.3,41.15 180 top
R49  10k  [0402-RES]  114.05,18.29 90 top
R50  10k  [0402-RES]  100.08,17.02 270 top
R51  1k  [0402-RES]  108.97,18.29 270 top
R52  510 0.5W  [2010]  128.02,36.07 90 top
R53  1k  [0402-RES]  131.83,33.53 0 top
R54  510 0.5W  [2010]  139.45,36.07 90 top
R55  1k  [0402-RES]  135.64,33.53 0 top
R56  4.7k  [0402-RES]  129.29,27.18 0 top
R57  10k  [0402-RES]  88.65,28.45 90 top
R58  100  [0402-RES]  131.83,24.64 270 top
R59  100  [0402-RES]  131.83,22.1 90 top
R60  10k  [0402-RES]  106.43,23.37 180 top
R61  10k  [0402-RES]  106.43,22.1 180 top
R62  1.5k  [0402-RES]  91.19,17.02 90 top
R63  62K  [0402-RES]  87.38,28.45 90 top
R64  10K  [0402-RES]  84.84,28.45 270 top
R65  4.7k  [0402-RES]  93.73,18.29 90 top
R66  330  [0402-RES]  97.54,27.18 0 top
R67  330  [0402-RES]  97.54,25.91 180 top
R68  330  [0402-RES]  97.54,24.64 0 top
R69  330  [0402-RES]  97.54,23.37 180 top
R70  1k  [0402-RES]  78.49,41.15 270 top
R71  10k  [0402-RES]  42.42,74.17 180 top
R72  10k  [0402-RES]  37.34,74.17 0 top
R73  10k  [0402-RES]  37.34,79.25 0 top
R74  10k  [0402-RES]  44.96,74.17 0 top
R75  4.7k  [0402-RES]  48.77,77.98 180 top
R76  1.2k  [0402-RES]  48.77,76.71 0 top
R77  10k  [0402-RES]  37.34,81.79 180 top
R78  10k  [0402-RES]  37.34,80.52 180 top
R79  10k  [0402-RES]  48.77,80.52 0 top
R80  240  [0402-RES]  13.21,91.95 0 top
R81  1.5k  [0402-RES]  34.8,67.82 180 top
R82  866  [0402-RES]  13.21,93.22 0 top
R83  374  [0402-RES]  13.21,94.49 180 top
R84  10k  [0402-RES]  44.96,71.63 90 top
R85  10k  [0402-RES]  30.99,70.36 270 top
R86  1k  [0402-RES]  39.88,71.63 270 top
R87  510 0.5W  [2010]  58.93,89.41 90 top
R88  1k  [0402-RES]  62.74,86.87 0 top
R89  510 0.5W  [2010]  70.36,89.41 90 top
R90  1k  [0402-RES]  66.55,86.87 0 top
R91  4.7k  [0402-RES]  60.2,80.52 0 top
R92  10k  [0402-RES]  19.56,81.79 90 top
R93  100  [0402-RES]  62.74,77.98 270 top
R94  100  [0402-RES]  62.74,75.44 90 top
R95  10k  [0402-RES]  37.34,76.71 180 top
R96  10k  [0402-RES]  37.34,75.44 180 top
R97  1.5k  [0402-RES]  22.1,70.36 90 top
R98  62K  [0402-RES]  18.29,81.79 90 top
R99  10K  [0402-RES]  15.75,81.79 270 top
R100  4.7k  [0402-RES]  24.64,71.63 90 top
R101  330  [0402-RES]  28.45,80.52 0 top
R102  330  [0402-RES]  28.45,79.25 180 top
R103  330  [0402-RES]  28.45,77.98 0 top
R104  330  [0402-RES]  28.45,76.71 180 top
R105  1k  [0402-RES]  9.4,94.49 270 top
R106  10k  [0402-RES]  111.51,74.17 180 top
R107  10k  [0402-RES]  106.43,74.17 0 top
R108  10k  [0402-RES]  106.43,79.25 0 top
R109  10k  [0402-RES]  114.05,74.17 0 top
R110  4.7k  [0402-RES]  117.86,77.98 180 top
R111  1.2k  [0402-RES]  117.86,76.71 0 top
R112  10k  [0402-RES]  106.43,81.79 180 top
R113  10k  [0402-RES]  106.43,80.52 180 top
R114  10k  [0402-RES]  117.86,80.52 0 top
R115  240  [0402-RES]  82.3,91.95 0 top
R116  1.5k  [0402-RES]  103.89,67.82 180 top
R117  866  [0402-RES]  82.3,93.22 0 top
R118  374  [0402-RES]  82.3,94.49 180 top
R119  10k  [0402-RES]  114.05,71.63 90 top
R120  10k  [0402-RES]  100.08,70.36 270 top
R121  1k  [0402-RES]  108.97,71.63 270 top
R122  510 0.5W  [2010]  128.02,89.41 90 top
R123  1k  [0402-RES]  131.83,86.87 0 top
R124  510 0.5W  [2010]  139.45,89.41 90 top
R125  1k  [0402-RES]  135.64,86.87 0 top
R126  4.7k  [0402-RES]  129.29,80.52 0 top
R127  10k  [0402-RES]  88.65,81.79 90 top
R128  100  [0402-RES]  131.83,77.98 270 top
R129  100  [0402-RES]  131.83,75.44 90 top
R130  10k  [0402-RES]  106.43,76.71 180 top
R131  10k  [0402-RES]  106.43,75.44 180 top
R132  1.5k  [0402-RES]  91.19,70.36 90 top
R133  62K  [0402-RES]  87.38,81.79 90 top
R134  10K  [0402-RES]  84.84,81.79 270 top
R135  4.7k  [0402-RES]  93.73,71.63 90 top
R136  330  [0402-RES]  97.54,80.52 0 top
R137  330  [0402-RES]  97.54,79.25 180 top
R138  330  [0402-RES]  97.54,77.98 0 top
R139  330  [0402-RES]  97.54,76.71 180 top
R140  1k  [0402-RES]  78.49,94.49 270 top
R141  10k  [0402-RES]  42.42,127.51 180 top
R142  10k  [0402-RES]  37.34,127.51 0 top
R143  10k  [0402-RES]  37.34,132.59 0 top
R144  10k  [0402-RES]  44.96,127.51 0 top
R145  4.7k  [0402-RES]  48.77,131.32 180 top
R146  1.2k  [0402-RES]  48.77,130.05 0 top
R147  10k  [0402-RES]  37.34,135.13 180 top
R148  10k  [0402-RES]  37.34,133.86 180 top
R149  10k  [0402-RES]  48.77,133.86 0 top
R150  240  [0402-RES]  13.21,145.29 0 top
R151  1.5k  [0402-RES]  34.8,121.16 180 top
R152  866  [0402-RES]  13.21,146.56 0 top
R153  374  [0402-RES]  13.21,147.83 180 top
R154  10k  [0402-RES]  44.96,124.97 90 top
R155  10k  [0402-RES]  30.99,123.7 270 top
R156  1k  [0402-RES]  39.88,124.97 270 top
R157  510 0.5W  [2010]  58.93,142.75 90 top
R158  1k  [0402-RES]  62.74,140.21 0 top
R159  510 0.5W  [2010]  70.36,142.75 90 top
R160  1k  [0402-RES]  66.55,140.21 0 top
R161  4.7k  [0402-RES]  60.2,133.86 0 top
R162  10k  [0402-RES]  19.56,135.13 90 top
R163  100  [0402-RES]  62.74,131.32 270 top
R164  100  [0402-RES]  62.74,128.78 90 top
R165  10k  [0402-RES]  37.34,130.05 180 top
R166  10k  [0402-RES]  37.34,128.78 180 top
R167  1.5k  [0402-RES]  22.1,123.7 90 top
R168  62K  [0402-RES]  18.29,135.13 90 top
R169  10K  [0402-RES]  15.75,135.13 270 top
R170  4.7k  [0402-RES]  24.64,124.97 90 top
R171  330  [0402-RES]  28.45,133.86 0 top
R172  330  [0402-RES]  28.45,132.59 180 top
R173  330  [0402-RES]  28.45,131.32 0 top
R174  330  [0402-RES]  28.45,130.05 180 top
R175  1k  [0402-RES]  9.4,147.83 270 top
R176  10k  [0402-RES]  111.51,127.51 180 top
R177  10k  [0402-RES]  106.43,127.51 0 top
R178  10k  [0402-RES]  106.43,132.59 0 top
R179  10k  [0402-RES]  114.05,127.51 0 top
R180  4.7k  [0402-RES]  117.86,131.32 180 top
R181  1.2k  [0402-RES]  117.86,130.05 0 top
R182  10k  [0402-RES]  106.43,135.13 180 top
R183  10k  [0402-RES]  106.43,133.86 180 top
R184  10k  [0402-RES]  117.86,133.86 0 top
R185  240  [0402-RES]  82.3,145.29 0 top
R186  1.5k  [0402-RES]  103.89,121.16 180 top
R187  866  [0402-RES]  82.3,146.56 0 top
R188  374  [0402-RES]  82.3,147.83 180 top
R189  10k  [0402-RES]  114.05,124.97 90 top
R190  10k  [0402-RES]  100.08,123.7 270 top
R191  1k  [0402-RES]  108.97,124.97 270 top
R192  510 0.5W  [2010]  128.02,142.75 90 top
R193  1k  [0402-RES]  131.83,140.21 0 top
R194  510 0.5W  [2010]  139.45,142.75 90 top
R195  1k  [0402-RES]  135.64,140.21 0 top
R196  4.7k  [0402-RES]  129.29,133.86 0 top
R197  10k  [0402-RES]  88.65,135.13 90 top
R198  100  [0402-RES]  131.83,131.32 270 top
R199  100  [0402-RES]  131.83,128.78 90 top
R200  10k  [0402-RES]  106.43,130.05 180 top
R201  10k  [0402-RES]  106.43,128.78 180 top
R202  1.5k  [0402-RES]  91.19,123.7 90 top
R203  62K  [0402-RES]  87.38,135.13 90 top
R204  10K  [0402-RES]  84.84,135.13 270 top
R205  4.7k  [0402-RES]  93.73,124.97 90 top
R206  330  [0402-RES]  97.54,133.86 0 top
R207  330  [0402-RES]  97.54,132.59 180 top
R208  330  [0402-RES]  97.54,131.32 0 top
R209  330  [0402-RES]  97.54,130.05 180 top
R210  1k  [0402-RES]  78.49,147.83 270 top
R211  10k  [0402-RES]  42.42,180.85 180 top
R212  10k  [0402-RES]  37.34,180.85 0 top
R213  10k  [0402-RES]  37.34,185.93 0 top
R214  10k  [0402-RES]  44.96,180.85 0 top
R215  4.7k  [0402-RES]  48.77,184.66 180 top
R216  1.2k  [0402-RES]  48.77,183.39 0 top
R217  10k  [0402-RES]  37.34,188.47 180 top
R218  10k  [0402-RES]  37.34,187.2 180 top
R219  10k  [0402-RES]  48.77,187.2 0 top
R220  240  [0402-RES]  13.21,198.63 0 top
R221  1.5k  [0402-RES]  34.8,174.5 180 top
R222  866  [0402-RES]  13.21,199.9 0 top
R223  374  [0402-RES]  13.21,201.17 180 top
R224  10k  [0402-RES]  44.96,178.31 90 top
R225  10k  [0402-RES]  30.99,177.04 270 top
R226  1k  [0402-RES]  39.88,178.31 270 top
R227  510 0.5W  [2010]  58.93,196.09 90 top
R228  1k  [0402-RES]  62.74,193.55 0 top
R229  510 0.5W  [2010]  70.36,196.09 90 top
R230  1k  [0402-RES]  66.55,193.55 0 top
R231  4.7k  [0402-RES]  60.2,187.2 0 top
R232  10k  [0402-RES]  19.56,188.47 90 top
R233  100  [0402-RES]  62.74,184.66 270 top
R234  100  [0402-RES]  62.74,182.12 90 top
R235  10k  [0402-RES]  37.34,183.39 180 top
R236  10k  [0402-RES]  37.34,182.12 180 top
R237  1.5k  [0402-RES]  22.1,177.04 90 top
R238  62K  [0402-RES]  18.29,188.47 90 top
R239  10K  [0402-RES]  15.75,188.47 270 top
R240  4.7k  [0402-RES]  24.64,178.31 90 top
R241  330  [0402-RES]  28.45,187.2 0 top
R242  330  [0402-RES]  28.45,185.93 180 top
R243  330  [0402-RES]  28.45,184.66 0 top
R244  330  [0402-RES]  28.45,183.39 180 top
R245  1k  [0402-RES]  9.4,201.17 270 top
R246  10k  [0402-RES]  111.51,180.85 180 top
R247  10k  [0402-RES]  106.43,180.85 0 top
R248  10k  [0402-RES]  106.43,185.93 0 top
R249  10k  [0402-RES]  114.05,180.85 0 top
R250  4.7k  [0402-RES]  117.86,184.66 180 top
R251  1.2k  [0402-RES]  117.86,183.39 0 top
R252  10k  [0402-RES]  106.43,188.47 180 top
R253  10k  [0402-RES]  106.43,187.2 180 top
R254  10k  [0402-RES]  117.86,187.2 0 top
R255  240  [0402-RES]  82.3,198.63 0 top
R256  1.5k  [0402-RES]  103.89,174.5 180 top
R257  866  [0402-RES]  82.3,199.9 0 top
R258  374  [0402-RES]  82.3,201.17 180 top
R259  10k  [0402-RES]  114.05,178.31 90 top
R260  10k  [0402-RES]  100.08,177.04 270 top
R261  1k  [0402-RES]  108.97,178.31 270 top
R262  510 0.5W  [2010]  128.02,196.09 90 top
R263  1k  [0402-RES]  131.83,193.55 0 top
R264  510 0.5W  [2010]  139.45,196.09 90 top
R265  1k  [0402-RES]  135.64,193.55 0 top
R266  4.7k  [0402-RES]  129.29,187.2 0 top
R267  10k  [0402-RES]  88.65,188.47 90 top
R268  100  [0402-RES]  131.83,184.66 270 top
R269  100  [0402-RES]  131.83,182.12 90 top
R270  10k  [0402-RES]  106.43,183.39 180 top
R271  10k  [0402-RES]  106.43,182.12 180 top
R272  1.5k  [0402-RES]  91.19,177.04 90 top
R273  62K  [0402-RES]  87.38,188.47 90 top
R274  10K  [0402-RES]  84.84,188.47 270 top
R275  4.7k  [0402-RES]  93.73,178.31 90 top
R276  330  [0402-RES]  97.54,187.2 0 top
R277  330  [0402-RES]  97.54,185.93 180 top
R278  330  [0402-RES]  97.54,184.66 0 top
R279  330  [0402-RES]  97.54,183.39 180 top
R280  1k  [0402-RES]  78.49,201.17 270 top
R281  10k  [0402-RES]  42.42,234.19 180 top
R282  10k  [0402-RES]  37.34,234.19 0 top
R283  10k  [0402-RES]  37.34,239.27 0 top
R284  10k  [0402-RES]  44.96,234.19 0 top
R285  4.7k  [0402-RES]  48.77,238 180 top
R286  1.2k  [0402-RES]  48.77,236.73 0 top
R287  10k  [0402-RES]  37.34,241.81 180 top
R288  10k  [0402-RES]  37.34,240.54 180 top
R289  10k  [0402-RES]  48.77,240.54 0 top
R290  240  [0402-RES]  13.21,251.97 0 top
R291  1.5k  [0402-RES]  34.8,227.84 180 top
R292  866  [0402-RES]  13.21,253.24 0 top
R293  374  [0402-RES]  13.21,254.51 180 top
R294  10k  [0402-RES]  44.96,231.65 90 top
R295  10k  [0402-RES]  30.99,230.38 270 top
R296  1k  [0402-RES]  39.88,231.65 270 top
R297  510 0.5W  [2010]  58.93,249.43 90 top
R298  1k  [0402-RES]  62.74,246.89 0 top
R299  510 0.5W  [2010]  70.36,249.43 90 top
R300  1k  [0402-RES]  66.55,246.89 0 top
R301  4.7k  [0402-RES]  60.2,240.54 0 top
R302  10k  [0402-RES]  19.56,241.81 90 top
R303  100  [0402-RES]  62.74,238 270 top
R304  100  [0402-RES]  62.74,235.46 90 top
R305  10k  [0402-RES]  37.34,236.73 180 top
R306  10k  [0402-RES]  37.34,235.46 180 top
R307  1.5k  [0402-RES]  22.1,230.38 90 top
R308  62K  [0402-RES]  18.29,241.81 90 top
R309  10K  [0402-RES]  15.75,241.81 270 top
R310  4.7k  [0402-RES]  24.64,231.65 90 top
R311  330  [0402-RES]  28.45,240.54 0 top
R312  330  [0402-RES]  28.45,239.27 180 top
R313  330  [0402-RES]  28.45,238 0 top
R314  330  [0402-RES]  28.45,236.73 180 top
R315  1k  [0402-RES]  9.4,254.51 270 top
R316  10k  [0402-RES]  111.51,234.19 180 top
R317  10k  [0402-RES]  106.43,234.19 0 top
R318  10k  [0402-RES]  106.43,239.27 0 top
R319  10k  [0402-RES]  114.05,234.19 0 top
R320  4.7k  [0402-RES]  117.86,238 180 top
R321  1.2k  [0402-RES]  117.86,236.73 0 top
R322  10k  [0402-RES]  106.43,241.81 180 top
R323  10k  [0402-RES]  106.43,240.54 180 top
R324  10k  [0402-RES]  117.86,240.54 0 top
R325  240  [0402-RES]  82.3,251.97 0 top
R326  1.5k  [0402-RES]  103.89,227.84 180 top
R327  866  [0402-RES]  82.3,253.24 0 top
R328  374  [0402-RES]  82.3,254.51 180 top
R329  10k  [0402-RES]  114.05,231.65 90 top
R330  10k  [0402-RES]  100.08,230.38 270 top
R331  1k  [0402-RES]  108.97,231.65 270 top
R332  510 0.5W  [2010]  128.02,249.43 90 top
R333  1k  [0402-RES]  131.83,246.89 0 top
R334  510 0.5W  [2010]  139.45,249.43 90 top
R335  1k  [0402-RES]  135.64,246.89 0 top
R336  4.7k  [0402-RES]  129.29,240.54 0 top
R337  10k  [0402-RES]  88.65,241.81 90 top
R338  100  [0402-RES]  131.83,238 270 top
R339  100  [0402-RES]  131.83,235.46 90 top
R340  10k  [0402-RES]  106.43,236.73 180 top
R341  10k  [0402-RES]  106.43,235.46 180 top
R342  1.5k  [0402-RES]  91.19,230.38 90 top
R343  62K  [0402-RES]  87.38,241.81 90 top
R344  10K  [0402-RES]  84.84,241.81 270 top
R345  4.7k  [0402-RES]  93.73,231.65 90 top
R346  330  [0402-RES]  97.54,240.54 0 top
R347  330  [0402-RES]  97.54,239.27 180 top
R348  330  [0402-RES]  97.54,238 0 top
R349  330  [0402-RES]  97.54,236.73 180 top
R350  1k  [0402-RES]  78.49,254.51 270 top
U1  3.3V  [SOT23-5]  70.36,27.94 180 top
U2  V_REG_317DPACK  [V-REG_DPACK]  19.56,41.15 0 top
U3  5V Reg.  [SOT23-5]  70.36,19.56 270 top
U4  3.3V  [SOT23-5]  139.45,27.94 180 top
U5  V_REG_317DPACK  [V-REG_DPACK]  88.65,41.15 0 top
U6  5V Reg.  [SOT23-5]  139.45,19.56 270 top
U7  3.3V  [SOT23-5]  70.36,81.28 180 top
U8  V_REG_317DPACK  [V-REG_DPACK]  19.56,94.49 0 top
U9  5V Reg.  [SOT23-5]  70.36,72.9 270 top
U10  3.3V  [SOT23-5]  139.45,81.28 180 top
U11  V_REG_317DPACK  [V-REG_DPACK]  88.65,94.49 0 top
U12  5V Reg.  [SOT23-5]  139.45,72.9 270 top
U13  3.3V  [SOT23-5]  70.36,134.62 180 top
U14  V_REG_317DPACK  [V-REG_DPACK]  19.56,147.83 0 top
U15  5V Reg.  [SOT23-5]  70.36,126.24 270 top
U16  3.3V  [SOT23-5]  139.45,134.62 180 top
U17  V_REG_317DPACK  [V-REG_DPACK]  88.65,147.83 0 top
U18  5V Reg.  [SOT23-5]  139.45,126.24 270 top
U19  3.3V  [SOT23-5]  70.36,187.96 180 top
U20  V_REG_317DPACK  [V-REG_DPACK]  19.56,201.17 0 top
U21  5V Reg.  [SOT23-5]  70.36,179.58 270 top
U22  3.3V  [SOT23-5]  139.45,187.96 180 top
U23  V_REG_317DPACK  [V-REG_DPACK]  88.65,201.17 0 top
U24  5V Reg.  [SOT23-5]  139.45,179.58 270 top
U25  3.3V  [SOT23-5]  70.36,241.3 180 top
U26  V_REG_317DPACK  [V-REG_DPACK]  19.56,254.51 0 top
U27  5V Reg.  [SOT23-5]  70.36,232.92 270 top
U28  3.3V  [SOT23-5]  139.45,241.3 180 top
U29  V_REG_317DPACK  [V-REG_DPACK]  88.65,254.51 0 top
U30  5V Reg.  [SOT23-5]  139.45,232.92 270 top
U$1  OSHW-LOGO  [OSHW-LOGO]  87.38,10.67 0 top
U$2  OSHW-LOGO  [OSHW-LOGO]  18.29,64.01 0 top
U$3  OSHW-LOGO  [OSHW-LOGO]  87.38,64.01 0 top
U$4  OSHW-LOGO  [OSHW-LOGO]  18.29,117.35 0 top
U$5  OSHW-LOGO  [OSHW-LOGO]  87.38,117.35 0 top
U$6  OSHW-LOGO  [OSHW-LOGO]  18.29,170.69 0 top
U$7  OSHW-LOGO  [OSHW-LOGO]  87.38,170.69 0 top
U$8  OSHW-LOGO  [OSHW-LOGO]  18.29,224.03 0 top
U$9  OSHW-LOGO  [OSHW-LOGO]  87.38,224.03 0 top
U$14  OSHW-LOGO  [OSHW-LOGO]  18.29,10.67 0 top
X1  Male DB9  [DB9_MALE]  110.24,42.42 0 top
X2  Male DB9  [DB9_MALE]  41.15,42.42 0 top
X3  Male DB9  [DB9_MALE]  41.15,95.76 0 top
X4  Male DB9  [DB9_MALE]  110.24,95.76 0 top
X5  Male DB9  [DB9_MALE]  41.15,149.1 0 top
X6  Male DB9  [DB9_MALE]  110.24,149.1 0 top
X7  Male DB9  [DB9_MALE]  41.15,202.44 0 top
X8  Male DB9  [DB9_MALE]  110.24,202.44 0 top
X9  Male DB9  [DB9_MALE]  41.15,255.78 0 top
X10  Male DB9  [DB9_MALE]  110.24,255.78 0 top
Y1  16MHz  [CRYSTAL-SMD-5X3]  13.21,22.1 90 top
Y2  16MHz  [CRYSTAL-SMD-5X3]  82.3,22.1 90 top
Y3  16MHz  [CRYSTAL-SMD-5X3]  13.21,75.44 90 top
Y4  16MHz  [CRYSTAL-SMD-5X3]  82.3,75.44 90 top
Y5  16MHz  [CRYSTAL-SMD-5X3]  13.21,128.78 90 top
Y6  16MHz  [CRYSTAL-SMD-5X3]  82.3,128.78 90 top
Y7  16MHz  [CRYSTAL-SMD-5X3]  13.21,182.12 90 top
Y8  16MHz  [CRYSTAL-SMD-5X3]  82.3,182.12 90 top
Y9  16MHz  [CRYSTAL-SMD-5X3]  13.21,235.46 90 top
Y10  16MHz  [CRYSTAL-SMD-5X3]  82.3,235.46 90 top

## Library data of the parts
C1-C180 D1-D40 IC1 IC6 IC9 IC12 IC15 IC18 IC21 IC24 IC27 IC30 JP1-JP100 LED1-LED50 Q1-Q60 R1-R7 R9 R10 R12-R51 R53 R55-R86 R88 R90-R121 R123 R125-R156 R158 R160-R191 R193 R195-R226 R228 R230-R261 R263 R265-R296 R298 R300-R331 R333 R335-R350 U1-U30 X1-X10 Y1-Y10 = SparkFun
E$1 = SparkFun-Retired
E$5 E$8 = SparkFun-Aesthetics
IC2 IC3 IC7 IC10 IC13 IC16 IC19 IC22 IC25 IC28 = _stn_logic; DESC: IC, Quad Comparator; MANUF: Texas Instruments; PARTNUM: LM339PWR; SUPPLIER: Digikey:296-6607-1-ND; VALSTAT: PARTNUM
IC4 IC5 IC8 IC11 IC14 IC17 IC20 IC23 IC26 IC29 = _stn_microchip; DESC: IC, CAN Transceiver; MANUF: Microchip Technology; PARTNUM: MCP2551-I/SN; SUPPLIER: Digikey:MCP2551-I/SN-ND; VALSTAT: PARTNUM
R8 R11 R52 R54 R87 R89 R122 R124 R157 R159 R192 R194 R227 R229 R262 R264 R297 R299 R332 R334 = _stn_rcl; DESC: Resistor; VALSTAT: VAL
U$1-U$9 U$14 = OSHW